# EAGLE board US (EAGLE 8.5.1)
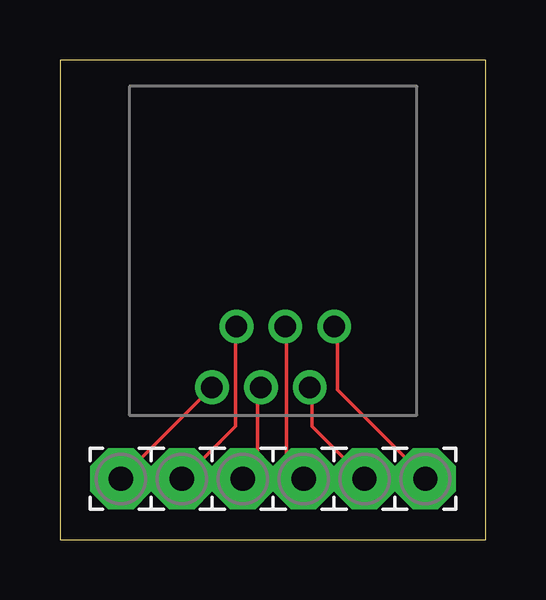
[diagram p0: board, top side]

Size 17.76 x 19.99 mm. Coordinates in mm from the lower left corner, seen from the top.
Outline: 0,0 17.76,0 17.76,19.99 0,19.99 0,0
Copper layers (1*16): Top 0.035mm / dielectric 1.5mm / Bottom 0.035mm
Design rules "default": minimum track width 6mil, minimum drill 0.35mm, track to track 6mil, track to pad 6mil, pad to pad 6mil, via to via 6mil, smd to smd 6mil, copper to edge 40mil, drill to drill 6mil, minimum pad ring 10mil, minimum via ring 8mil, stop-mask expansion 4mil, vias tented up to drill 0mil, thermal gap 10mil

## Footprints (pad centres in the part's own frame; a part is rotated, then mirrored left to right if it is on the bottom)
6P6C_FEMALE = drill 0.9 pad 1.3: 1 -1.53,1.27; 2 0.51,1.27; 3 2.55,1.27; 4 -2.55,-1.27; 5 -0.51,-1.27; 6 1.53,-1.27
2,54/1,0 = drill 1.016 pad 2.54 octagon: 1 0,0

## Placement (x,y rotation side)
C1  [6P6C_FEMALE]  8.89,7.62 0 top
PAD1  [2,54/1,0]  5.08,2.54 90 top
PAD2  [2,54/1,0]  10.16,2.54 90 top
PAD3  [2,54/1,0]  15.24,2.54 90 top
PAD4  [2,54/1,0]  2.54,2.54 90 top
PAD5  [2,54/1,0]  7.62,2.54 90 top
PAD6  [2,54/1,0]  12.7,2.54 90 top

## Library data of the parts
C1 = Yijiano
PAD1-PAD6 = wirepad

## Nets
N$1: C1.1 PAD1.1
N$2: C1.2 PAD2.1
N$3: C1.3 PAD3.1
N$4: C1.4 PAD4.1
N$5: C1.5 PAD5.1
N$6: C1.6 PAD6.1

## Tracks (layer width: path | path; a pad name or v marks a point on that pad's centre or on a via)
N$1
  Top 0.152: C1.1 7.32,8.84 7.32,4.72 5.18,2.59 PAD1.1
N$2
  Top 0.152: C1.2 9.45,8.84 9.45,3.2 10.06,2.59 PAD2.1
N$3
  Top 0.152: C1.3 11.58,8.84 11.58,6.25 15.24,2.59 PAD3.1
N$4
  Top 0.152: PAD4.1 6.25,6.25 C1.4
N$5
  Top 0.152: 8.23,3.2 7.62,2.59 PAD5.1 8.23,3.2 | 8.23,3.2 8.23,6.25 C1.5
N$6
  Top 0.152: PAD6.1 10.52,4.72 10.52,6.25 C1.6